# Altium PCB DRVS-PCB.PcbDoc (part 3 of 3)
Units mm, origin at the board's own origin, x right, y up, seen from the top; angles counter-clockwise.
Board outline 50.67 x 58.05 mm, 4 copper layers (Top Layer, Layer 1, Layer 2, Bottom Layer), stack 1.553 mm thick; 72 components, 76 nets, 302 pads, 127 vias.
Unrouted connection lines stored in the file: 20.
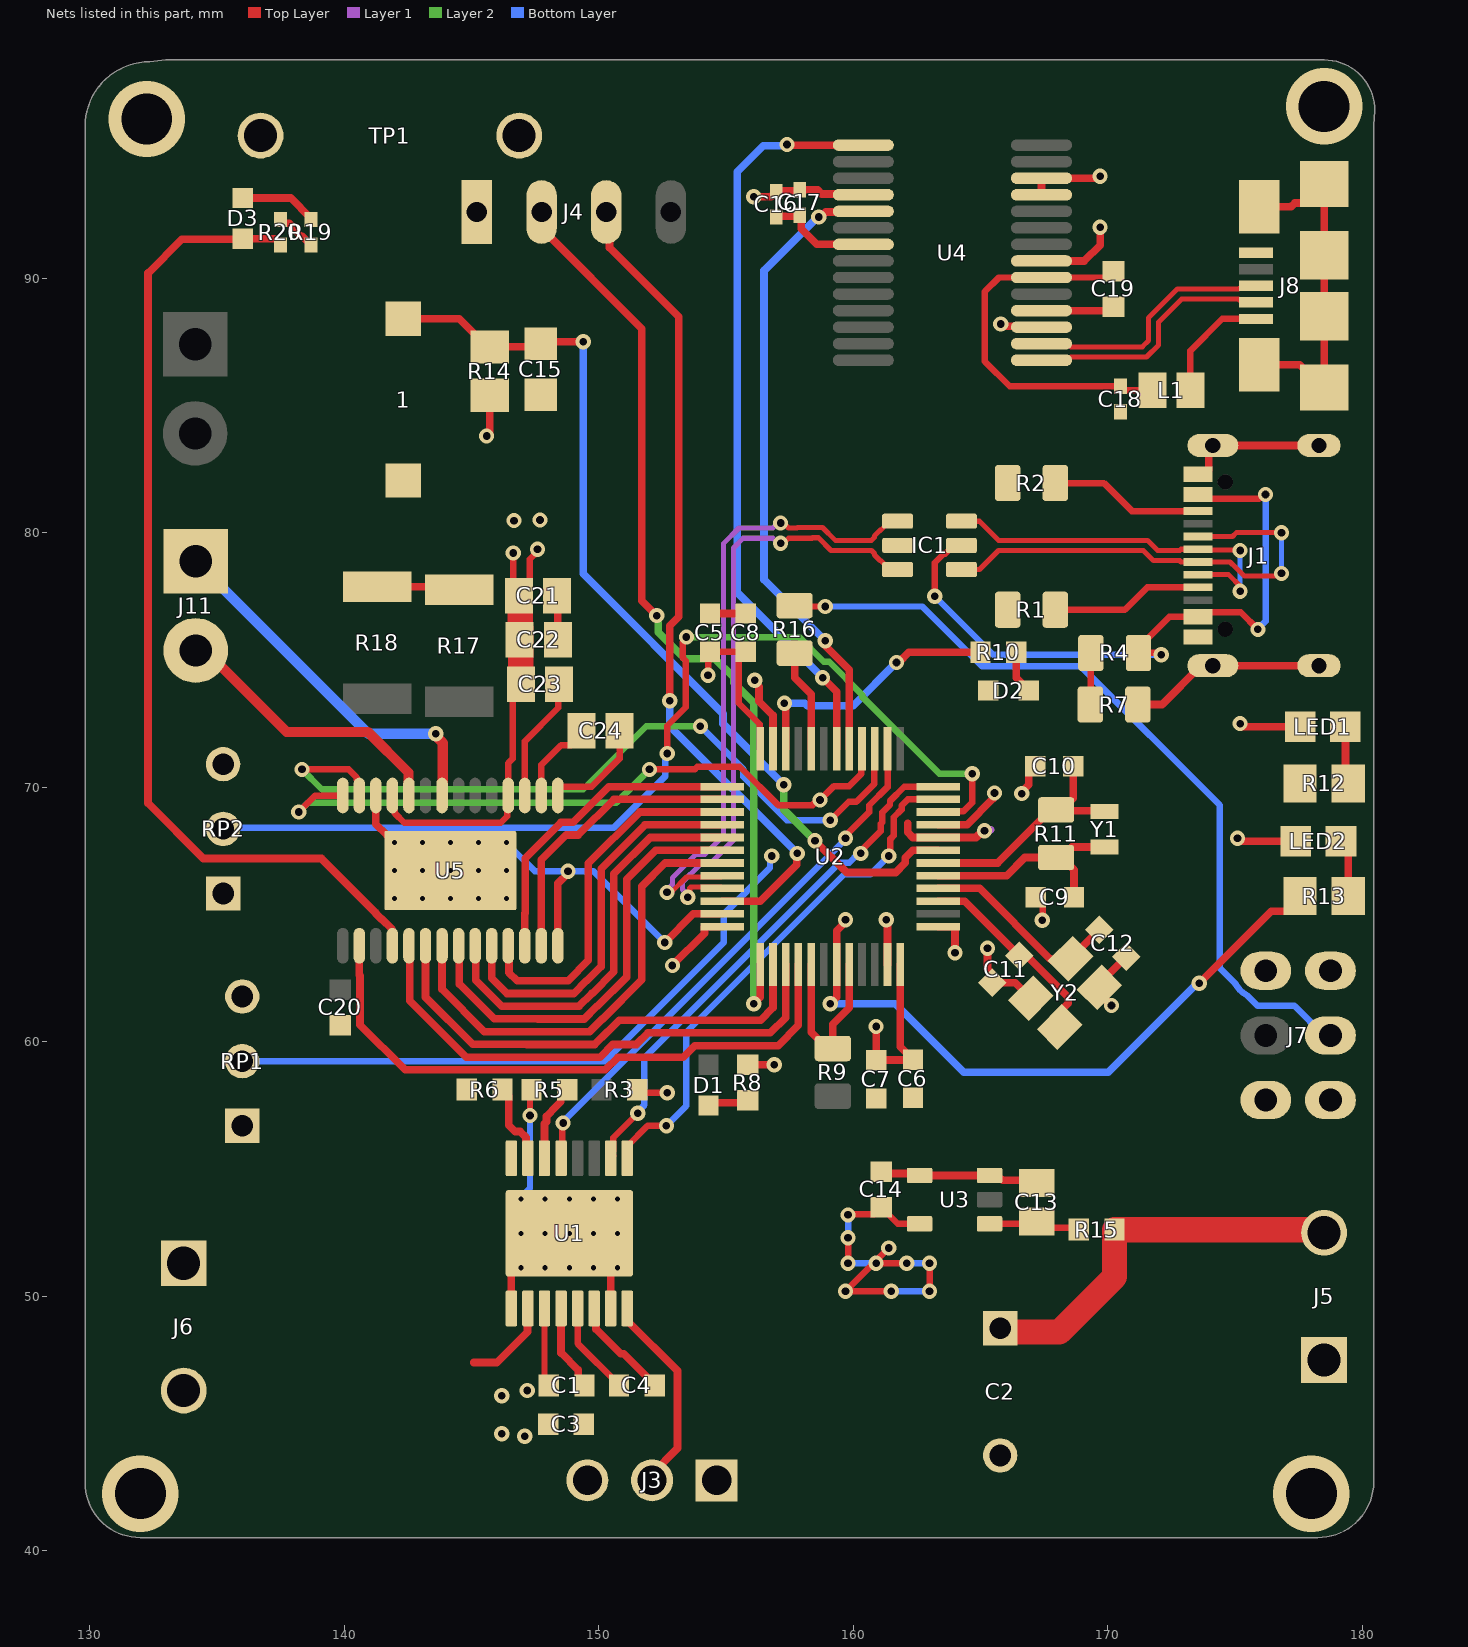
[diagram p4: the nets of this part, all layers, seen from the top]

## Via types
v1: diameter 0.6, hole 0.3, Top Layer to Bottom Layer, 93 vias
v2: diameter 0.5, hole 0.2, Top Layer to Bottom Layer, 18 vias
v3: diameter 0.5, hole 0.2, Top Layer to Bottom Layer, tented both sides, 12 vias
v4: diameter 3, hole 2, Top Layer to Bottom Layer, 4 vias

## Nets (pads, with @x,y where several pads share a name; then routed paths per layer and width w, separated by ;. In a path a pad name is that pad's centre, name@x,y a point inside that pad or via, vN(x,y) a via of type N, cw(c..) or ccw(c..) an arc to the next point about the centre after c; other vN are vias at no path point) (continued)
BOOT1: J7.4 R16.1 | length 31.8
  Top Layer w0.254: R16.1@157.7,77.135 157.735,77.1 v1(158.9,77.1)
  Bottom Layer w0.254: v1(158.9,77.1) 162.713,77.1 165.067,74.746 168.954,74.746 174.4,69.3 174.4,62.9 175.002,62.298 ccw(c175.96,62.79) 175.468,61.832 175.884,61.416 177.334,61.416 178.5,60.25 J7.4@178.75,60.25
BOUT1: J11.2 U5.10 | length 11.3
  Top Layer w0.4: J11.2@134.175,75.375 134.538,75.375 137.738,72.175 140.938,72.175 142.531,70.582 142.531,69.694 U5.10@142.55,69.675
BOUT2: J11.1 U5.8 | length 14.8
  Top Layer w0.4: v1(143.6,72.1) 143.638,72.062 143.638,71.981 143.875,71.744 143.875,70.21 143.86,70.195 143.86,69.685 U5.8@143.85,69.675
  Bottom Layer w0.4: J11.1@134.175,78.88 140.955,72.1 v1(143.6,72.1)
CPH: C4.1 U1.13 | length 3.8
  Top Layer w0.254: U1.13@149.174,49.525 149.174,48.151 150.8,46.525 C4.1@150.8,46.5 C4.1@150.874,46.574
CPL: C4.2 U1.14 | length 4.1
  Top Layer w0.3: U1.14@149.824,49.525 149.899,49.45 149.899,48.709 150.866,47.742 150.983,47.742 152.2,46.525 C4.2@152.2,46.5
D_N: IC1.1 U2.32 | length 24.9
  Top Layer w0.2: v1@152.892,65.913 153.454,66.475 154.812,66.475 U2.32@154.862,66.525 ; v1(157.15,80.383) 157.258,80.383 157.458,80.183 157.799,80.183 157.816,80.2 158.8,80.2 159.3,79.7 160.723,79.7 160.84,79.817 160.84,79.876 161.059,80.095 161.08,80.095 161.435,80.45 IC1.1@161.745,80.45
  Layer 1 w0.2: v1(152.688,65.868) 152.688,65.974 152.899,66.186 152.899,66.441 153.816,67.358 154.169,67.358 154.9,68.089 154.9,79.566 155.517,80.183 156.842,80.183 157.042,80.383 v1(157.15,80.383)
D_P: IC1.3 U2.33 | length 24.2
  Top Layer w0.2: v1@153.355,65.528 v1(153.503,65.675) v1@153.4,65.675 ; v1@153.394,65.675 v1@153.4,65.675 ; U2.33@154.862,66.025 154.812,66.075 154.012,66.075 153.62,66.075 153.579,66.034 153.579,65.854 v1@153.4,65.675 ; v1(157.15,79.583) 157.258,79.583 157.458,79.783 158.383,79.783 158.4,79.8 158.634,79.8 159.134,79.3 160.723,79.3 160.84,79.183 160.84,79.124 161.059,78.905 161.08,78.905 161.435,78.55 IC1.3@161.745,78.55
  Layer 1 w0.2: v1(153.503,65.675) 153.503,65.783 153.299,65.987 153.299,66.275 153.982,66.958 154.335,66.958 155.3,67.923 155.3,79.4 155.683,79.783 156.842,79.783 157.042,79.583 v1(157.15,79.583)
EN_IN1: U1.1 U2.11 | length 20.9
  Top Layer w0.254: U1.1@151.124,55.425 151.124,55.9 151.924,56.7 v1(152.665,56.7) ; v1(161.4,67.3) 161.466,67.366 161.466,67.968 161.6,68.102 161.6,68.822 161.901,69.124 161.901,69.274 162.152,69.525 U2.11@163.338,69.525
  Bottom Layer w0.254: v1(152.665,56.7) 153.446,57.481 153.446,60.375 159.652,66.581 160.681,66.581 v1(161.4,67.3)
GND: 1.1 C2.2 C3.2 C5.1 C6.1 C7.1 C8.1 C9.1 C10.1 C11.1 C12.1 C13.2 C14.2 C15.1 C16.2 C17.2 C18.2 C19.2 C20.2 C21.1 C22.1 D2.1 IC1.2 J1.A1_B12 J1.B1_A12 J1.S1 J1.S2 J1.S3 J1.S4 J3.1 J4.1 J5.1 J7.5 J7.6 J8.5 J8.6 J8.7 J8.8 J8.9 J8.10 J8.11 R1.2 R2.1 R5.1 R6.1 R7.2 R12.1 R17.1 R18.1 RP1.1 RP2.1 TP1.1 TP1.2 U1.9 U1.15 U1.17@148.849,52.475 U2.8 U2.23 U2.35 U2.47 U3.3 U3.4 U4.7 U4.18 U4.21 U4.25 U4.26 U5.12 U5.28 U5.29 Y2.2 Y2.4 | length 93.9
  Top Layer w0.254: v1(147.305,57.103) 147.305,58.063 R5.1@147.361,58.12 ; C9.1@167.175,65.675 167.448,65.402 167.448,64.798 v1(167.425,64.775)
  Top Layer w0.3: U5.12@141.25,69.675 141.25,68.55 141.675,68.125 141.735,68.125 141.975,67.885 v2(141.975,67.825) ; R18.1@141.3,77.875 144.4,77.875 R17.1@144.525,77.75 ; U1.9@146.574,49.525 146.574,50.925 146.774,51.125 v3(146.949,51.125) ; C21.1@148.375,77.525 148.4,77.5 C22.1@148.4,75.8 ; U5.28@148.4,63.775 148.4,66.219 148.8,66.619 v1(148.8,66.7) ; U1.15@150.474,49.525 150.474,50.925 150.674,51.125 v3(150.749,51.125) ; v1(152.6,63.9) 153.725,65.025 U2.35@154.862,65.025 ; C5.1@154.375,76.825 C8.1@155.775,76.825 ; v1(156.132,74.2) 156.132,74.119 156.3,73.951 156.3,73.381 156.85,72.831 U2.23@156.85,71.513 ; C16.2@156.975,92.4 157.013,92.437 C17.2@157.863,92.437 ; C17.2@157.9,92.475 157.956,92.419 157.956,91.944 158.575,91.325 U4.7@160.4,91.325 ; C14.2@161.1,54.9 161.175,54.825 162.534,54.825 U3.4@162.609,54.75 U3.3@165.359,54.75 165.509,54.6 165.838,54.6 165.884,54.555 166.859,54.555 C13.2@167.213,54.2 ; v1(161.3,64.8) 161.35,64.75 U2.47@161.35,63.037 ; 162.138,68.575 162.138,68.23 162.343,68.025 U2.8@163.338,68.025 164.825,68.025 165.09,68.29 v1(165.16,68.29) ; v1(165.275,63.675) 165.275,62.868 165.47,62.673 C11.1@165.47,62.32 166.375,62.32 Y2.4@166.981,61.713 ; v1(166.625,69.75) 166.625,69.831 166.9,70.106 166.9,70.569 C10.1@167.15,70.819 ; U4.18@167.4,88.725 170.075,88.725 C19.2@170.225,88.875 ; U4.21@167.4,90.675 169.075,90.675 169.7,91.3 v1(169.7,92) ; U4.25@167.4,93.275 U4.26@167.4,93.925 169.625,93.925 v1(169.7,94) ; v1(170.15,61.425) 169.668,61.907 Y2.2@169.668,62.137 169.668,62.283 C12.1@170.73,63.345 ; R7.2@171.185,73.25 172.135,73.25 173.66,74.775 J1.S1@174.13,74.775 J1.S3@178.3,74.775 ; J1.B1_A12@173.55,82.3 173.82,82.3 173.97,82.45 173.97,83.265 J1.S2@174.13,83.425 J1.S4@178.3,83.425 ; J8.10@175.95,86.6 177.55,86.6 178.45,85.7 178.5,85.75 J8.6@178.5,88.5 J8.7@178.5,90.9 J8.9@178.5,93.7 177.75,92.95 177.35,92.95 177.2,92.8 J8.11@175.95,92.8
  Layer 1 w0.3: v1(165.16,68.29) 165.194,68.325 v1@165.4,68.325
  Bottom Layer w0.254: v2(146.375,67.825) 147.5,66.7 v1(148.8,66.7) 149.8,66.7 v1(152.6,63.9) ; v3(146.949,53.825) 146.949,53.892 147.305,54.247 v1(147.305,57.103)
  other v2: 147.899,52.475 148.849,52.475 149.799,52.475 141.975,65.625 143.075,65.625 144.175,65.625 145.275,65.625 146.375,65.625 141.975,66.725 143.075,66.725 144.175,66.725 145.275,66.725 146.375,66.725 143.075,67.825 144.175,67.825 145.275,67.825
  other v3: 147.899,51.125 148.849,51.125 149.799,51.125 146.949,52.475 150.749,52.475 147.899,53.825 148.849,53.825 149.799,53.825 150.749,53.825
  other v4: 132,42.25 178,42.25 132.25,96.25 178.5,96.75
GPIO_V3P3: R19.2 R20.2 | length 1.7
  Top Layer w0.3: R20.2@137.5,92.3 137.5,92.25 137.6,92.15 137.85,92.15 138.1,91.9 138.1,91.855 138.305,91.65 138.35,91.65 138.55,91.45 138.6,91.45 138.7,91.35 R19.2@138.7,91.3
IMODE: R6.2 U1.7 | length 3.2
  Top Layer w0.3: R6.2@146.224,58.125 146.474,57.875 146.474,56.726 146.725,56.475 146.915,56.475 147.149,56.241 147.149,55.5 U1.7@147.224,55.425
NetC1_2: C1.2 U1.12 | length 3.4
  Top Layer w0.3: U1.12@148.524,49.525 148.524,47.776 149.196,47.104 149.196,46.75 C1.2@149.446,46.5
NetC13_1: C13.1 R15.2 U3.1 | length 3.6
  Top Layer w0.254: U3.1@165.359,52.85 167.063,52.85 167.213,52.7 168.792,52.7 R15.2@168.867,52.625
NetC24_1: C24.1 U5.1 | length 4.3
  Top Layer w0.254: U5.1@148.4,69.675 148.4,69.932 148.491,70.023 149.723,70.023 150.825,71.125 C24.1@150.825,72.225
NetC24_2: C24.2 U5.2 | length 3.4
  Top Layer w0.254: U5.2@147.75,69.675 147.75,70.875 148.527,71.652 148.902,71.652 149.325,72.075 C24.2@149.325,72.225
NetD1_2: D1.2 R8.2 | length 1.6
  Top Layer w0.3: D1.2@154.318,57.5 154.418,57.6 155.764,57.6 R8.2@155.864,57.7
NetD2_2: D2.2 R10.2 | length 1.7
  Top Layer w0.3: R10.2@166.4,75.3 166.4,74.3 D2.2@166.9,73.8
NetD3_2: D3.2 R19.1 | length 3.1
  Top Layer w0.3: D3.2@136.025,93.15 137.9,93.15 138.7,92.35 R19.1@138.7,92.3
NetJ1_A5: J1.A5 R1.1 | length 6
  Top Layer w0.254: R1.1@167.941,76.975 170.675,76.975 171.55,77.85 J1.A5@173.55,77.85
NetJ1_B5: J1.B5 R2.2 | length 6.1
  Top Layer w0.254: R2.2@167.941,81.95 169.85,81.95 170.95,80.85 J1.B5@173.55,80.85
NetLED1_K: LED1.K R12.2 | length 2.3
  Top Layer w0.3: LED1.K@179.339,72.375 179.339,70.261 R12.2@179.45,70.15
NetLED2_K: LED2.K R13.2 | length 2.3
  Top Layer w0.3: LED2.K@179.164,67.875 179.45,67.589 R13.2@179.45,65.725
NetR16_2: R16.2 U2.20 | length 4
  Top Layer w0.3: R16.2@157.7,75.265 157.7,74.3 158.35,73.65 U2.20@158.35,71.513
nFAULT: D3.1 R20.1 U5.18 | length 39
  Top Layer w0.3: R20.1@137.5,91.3 137.5,91.35 137.3,91.55 D3.1@136.025,91.55 136.005,91.53 133.63,91.53 132.3,90.2 132.3,69.375 134.475,67.2 139.113,67.2 141.235,65.078 141.235,65.057 141.467,64.825 141.488,64.825 141.871,64.442 141.871,63.804 U5.18@141.9,63.775
NRST: 1.2 C15.2 R14.1 U2.7 | length 36.8
  Top Layer w0.3: 1.2@142.325,88.4 144.525,88.4 145.625,87.3 R14.1@145.725,87.3 147.6,87.3 C15.2@147.725,87.425 147.8,87.5 v1(149.4,87.5) ; v1(158.5,67.9) 159.75,66.65 161.669,66.65 162.05,67.031 162.05,67.232 162.343,67.525 U2.7@163.338,67.525
  Layer 2 w0.3: v1@157.275,70.089 157.275,69.125 v1(158.5,67.9)
  Bottom Layer w0.3: v1(149.4,87.5) 149.4,78.381 154.887,72.894 154.887,72.488 v1(157.275,70.1)
OUT1: J6.1 U1.8
OUT2: J6.2 U1.10 | length 3.5
  Top Layer w0.3: 145.1,47.4 146,47.4 147.208,48.608 147.208,49.509 U1.10@147.224,49.525
PB5: R9.1 U2.41 U2.44 | length 7.3
  Top Layer w0.3: U2.41@158.35,63.037 158.35,60.375 158.99,59.735 R9.1@159.2,59.735 159.2,60.681 159.85,61.331 U2.44@159.85,63.037
PB12: R13.1 U2.43 | length 26
  Top Layer w0.3: v1(159.1,61.5) 159.35,61.75 159.35,64.369 159.7,64.719 v1(159.7,64.8) ; v1(173.6,62.3) 176.425,65.125 177.05,65.125 177.55,65.625 R13.1@177.55,65.725
  Bottom Layer w0.3: v1(159.1,61.5) 161.65,61.5 164.35,58.8 170.025,58.8 173.525,62.3 v1(173.6,62.3)
PH_IN2: U1.2 U2.12 | length 21.1
  Top Layer w0.254: U1.2@150.474,55.425 150.572,55.523 150.474,55.621 150.572,55.719 150.572,56.231 150.793,56.452 150.796,56.452 v1(151.539,57.195) ; v1(160.3,67.4) 160.3,67.494 161.086,68.279 161.086,68.557 161.146,68.617 161.146,69.011 161.447,69.312 161.447,69.462 162.01,70.025 U2.12@163.338,70.025
  Bottom Layer w0.254: v1(151.539,57.195) 151.539,57.256 151.8,57.517 151.8,59.371 159.464,67.035 159.841,67.035 160.206,67.4 v1(160.3,67.4)
PIN13: U2.15 U5.13 | length 30.5
  Top Layer w0.254: v1(138.35,70.7) v1(138.35,70.7) 140.179,70.702 140.502,70.379 140.502,70.301 140.6,70.203 U5.13@140.6,69.675 ; v1(159.1,68.7) 159.827,69.427 160.127,69.427 160.827,70.127 160.827,71.49 U2.15@160.85,71.513
  Layer 2 w0.254: v1(138.35,70.7) 139.125,69.925 149.4,69.925 151.875,72.4 v1(154,72.4)
  Bottom Layer w0.254: v1(154,72.4) 155.683,70.717 155.683,70.417 157.4,68.7 v1(159.1,68.7)
PIN14: U2.16 U5.14 | length 27
  Top Layer w0.254: v1(138.225,69.029) 138.871,69.675 U5.14@139.95,69.675 ; v1(152,70.7) 153.772,70.7 153.872,70.8 155.549,70.8 157.049,69.3 158.406,69.3 158.606,69.5 v1(158.7,69.5) 159.247,70.047 159.846,70.047 160.327,70.528 160.327,71.49 U2.16@160.35,71.513
  Layer 2 w0.254: v1(138.225,69.029) 138.596,69.4 150.7,69.4 v1(152,70.7)
PIN19: U2.39 U5.19 | length 20.6
  Top Layer w0.3: U5.19@142.55,63.775 142.579,63.746 142.579,61.621 144.8,59.4 146.976,59.4 146.981,59.395 150.057,59.395 150.557,59.895 151.488,59.895 151.943,60.35 156.75,60.35 157.35,60.95 U2.39@157.35,63.037
PIN20: U2.38 U5.20 | length 18.7
  Top Layer w0.3: U5.20@143.2,63.775 143.2,61.75 145.05,59.9 147.183,59.9 147.188,59.895 149.849,59.895 150.349,60.395 150.364,60.395 150.819,60.85 155.831,60.85 156.369,60.85 156.85,61.331 U2.38@156.85,63.037
PIN21: U2.31 U5.21 | length 18.3
  Top Layer w0.3: U5.21@143.85,63.775 143.85,62.066 145.516,60.4 147.391,60.4 147.396,60.395 149.642,60.395 150.142,60.895 150.157,60.895 151.7,62.438 151.7,65.185 151.7,66.1 152.625,67.025 U2.31@154.862,67.025
PIN22: U2.30 U5.22 | length 17.4
  Top Layer w0.3: U5.22@144.5,63.775 144.529,63.746 144.529,62.273 145.902,60.9 147.598,60.9 147.603,60.895 149.435,60.895 149.935,61.395 149.95,61.395 151.1,62.545 151.1,66.386 152.239,67.525 U2.30@154.862,67.525
PIN23: U2.29 U5.23 | length 16.5
  Top Layer w0.3: U5.23@145.15,63.775 145.179,63.746 145.179,62.414 146.193,61.4 147.805,61.4 147.81,61.395 149.228,61.395 149.728,61.895 149.743,61.895 150.6,62.752 150.6,66.593 152.032,68.025 U2.29@154.862,68.025
PIN24: U2.28 U5.24 | length 15.6
  Top Layer w0.3: U5.24@145.8,63.775 145.8,62.5 146.4,61.9 148.012,61.9 148.017,61.895 149.021,61.895 149.521,62.395 149.536,62.395 150.1,62.959 150.1,66.8 151.825,68.525 U2.28@154.862,68.525
PIN25: U2.27 U5.25 | length 14.6
  Top Layer w0.3: U5.25@146.45,63.775 146.479,63.746 146.479,62.721 146.8,62.4 148.8,62.4 149.6,63.2 149.6,67.007 151.618,69.025 U2.27@154.862,69.025
PMODE: J3.2 U1.16 | length 8.5
  Top Layer w0.3: U1.16@151.124,50 U1.16@151.124,49.525 151.124,49.05 153.1,47.074 153.1,44.03 152.1,43.03 J3.2@152.1,42.776
RX: U2.17 U4.5 | length 25
  Top Layer w0.3: v1(158.65,92.4) 158.731,92.4 158.927,92.596 160.371,92.596 U4.5@160.4,92.625 ; v1(158.899,75.757) 158.899,75.561 159.85,74.61 U2.17@159.85,71.513
  Bottom Layer w0.3: v1(158.65,92.4) 158.6,92.4 156.5,90.3 156.5,78.156 v1(158.899,75.757)
SPD_REF_1: RP1.2 | length 25
  Bottom Layer w0.254: RP1.2@136,59.24 150.248,59.24 154.923,63.915 154.923,65.023 156.734,66.834 156.734,67.234 v1(156.8,67.3)
SPD_REF_2: RP2.2 U2.10 | length 40.3
  Top Layer w0.254: v1(152.7,71.327) 152.7,72.413 153.427,73.14 153.427,74.973 153.3,75.1 153.3,75.7 153.45,75.85 v1(153.45,75.9) ; U2.10@163.338,69.025 163.361,69.048 164.323,69.048 164.675,69.4 v1(164.675,70.525)
  Layer 2 w0.254: v1(153.45,75.9) 157.869,75.9 158.842,74.927 159.06,74.927 160.35,73.637 160.35,73.563 163.388,70.525 v1(164.675,70.525)
  Bottom Layer w0.254: RP2.2@135.25,68.365 135.287,68.402 150.589,68.402 152.627,70.44 152.627,71.227 152.7,71.3 v1(152.7,71.327)
STATUS: R10.1 U2.22 | length 10.4
  Top Layer w0.3: v1(157.3,73.3) 157.35,73.25 U2.22@157.35,71.513 ; v1(161.7,74.9) 161.781,74.9 162.181,75.3 R10.1@165,75.3
  Bottom Layer w0.3: v1(157.3,73.3) 158.1,73.3 158.2,73.2 160,73.2 v1(161.7,74.9)
STM32H7_VBUS: R4.2 R7.1 | length 2
  Top Layer w0.254: R7.1@169.315,73.25 169.327,73.262 169.327,75.262 R4.2@169.34,75.275
SWCLK: J4.2 U2.37 | length 36.9
  Top Layer w0.3: J4.2@147.76,92.6 147.76,91.95 151.7,88.01 151.7,77.325 v1(152.282,76.743) ; v1(156.1,61.5) 156.35,61.75 U2.37@156.35,63.037
  Layer 2 w0.3: v1(152.282,76.743) 152.34,76.685 152.34,76.091 153.381,75.05 154.569,75.05 155.306,74.313 155.306,74.107 156.1,73.313 v1(156.1,61.5)
SWDIO: J4.3 U2.34 | length 32.6
  Top Layer w0.3: J4.3@150.3,92.6 150.43,92.47 150.43,91.195 153.15,88.475 153.15,76.7 152.8,76.35 v1(152.8,73.4) ; U2.34@154.862,65.525 156.344,65.525 157.779,66.96 157.779,67.379 v1(157.8,67.4)
  Bottom Layer w0.3: v1(152.8,73.4) 152.8,72.4 v1(157.8,67.4)
TOFF: U2.40 U5.16 | length 24.2
  Top Layer w0.3: U5.16@140.6,63.775 140.6,62.62 140.625,62.595 140.625,60.675 142.4,58.9 146.769,58.9 146.774,58.895 150.264,58.895 150.764,59.395 153.318,59.395 153.773,59.85 157.05,59.85 157.85,60.65 U2.40@157.85,63.037
TRQ0: U2.26 U5.27 | length 11.5
  Top Layer w0.3: U5.27@147.75,63.775 147.75,67.143 148.732,68.125 149.207,68.125 150.607,69.525 U2.26@154.862,69.525
TRQ1: U2.25 U5.26 | length 12.4
  Top Layer w0.3: U5.26@147.1,63.775 147.1,65.042 147.115,65.057 147.115,67.215 148.525,68.625 149,68.625 150.4,70.025 U2.25@154.862,70.025
TX: U2.18 U4.1 | length 29.7
  Top Layer w0.3: v1(157.4,95.25) 157.425,95.225 U4.1@160.4,95.225 ; v1(158.8,74.3) 159.35,73.75 U2.18@159.35,71.513
  Bottom Layer w0.3: v1(157.4,95.25) 157.345,95.195 156.47,95.195 155.45,94.175 155.45,77.65 v1(158.8,74.3)
USB_Con_C1_N: IC1.6 J1.A7 J1.B7 | length 15.1
  Top Layer w0.2: IC1.6@164.255,80.45 164.96,80.45 165.71,79.7 171.566,79.7 171.966,79.3 172.83,79.3 172.88,79.35 J1.A7@173.55,79.35 173.575,79.325 175.175,79.325 v1(175.2,79.3) ; J1.B7@173.55,78.35 174.75,78.35 175.217,77.883 175.217,77.717 v1(175.2,77.7)
  Bottom Layer w0.2: v1(175.2,77.7) v1(175.2,79.3)
USB_Con_C1_P: IC1.4 J1.A6 J1.B6 | length 18.3
  Top Layer w0.2: IC1.4@164.255,78.55 164.96,78.55 165.71,79.3 171.4,79.3 171.8,78.9 172.83,78.9 172.88,78.85 J1.A6@173.55,78.85 174.801,78.85 174.901,78.75 174.916,78.75 175.366,78.3 176.619,78.3 176.719,78.4 v1(176.827,78.4) ; J1.B6@173.55,79.85 174.901,79.85 175.051,80 v1(176.827,80)
  Bottom Layer w0.2: v1(176.827,78.4) v1(176.827,80)
USB_Conn_C1_VBUS: IC1.5 J1.A4_B9 J1.B4_A9 R4.1 | length 27.4
  Top Layer w0.254: v1(163.2,77.5) 163.2,78.814 163.558,79.172 163.617,79.172 163.945,79.5 IC1.5@164.255,79.5 ; v1(172.1,75.2) 172.025,75.275 R4.1@171.21,75.275 171.21,75.485 172.425,76.7 J1.A4_B9@173.55,76.7 173.723,76.873 175.227,76.873 v1(175.9,76.2) ; J1.B4_A9@173.55,81.5 173.723,81.327 175.933,81.327 176.106,81.5 v1(176.2,81.5)
  Bottom Layer w0.254: v1(163.2,77.5) 165.5,75.2 v1(172.1,75.2) ; v1(175.9,76.2) 175.9,76.222 176.2,76.522 v1(176.2,81.5)
USB_N: J8.2 U4.15 | length 10
  Top Layer w0.2: U4.15@167.4,86.775 168.443,86.775 168.568,86.9 171.524,86.9 172,87.376 172,88.275 172.9,89.175 174.397,89.175 175.133,89.175 175.158,89.15 175.725,89.15 J8.2@175.825,89.05
USB_P: J8.3 U4.16 | length 10
  Top Layer w0.2: U4.16@167.4,87.425 168.443,87.425 168.568,87.3 171.358,87.3 171.6,87.542 171.6,88.441 172.734,89.575 174.563,89.575 175.133,89.575 175.158,89.6 175.725,89.6 J8.3@175.825,89.7
V_IPROPI: R5.2 U1.6 | length 3.1
  Top Layer w0.3: U1.6@147.874,55.425 147.874,56.774 147.954,56.854 147.954,57.081 148.335,57.462 ; 148.336,57.462 148.511,57.638 148.511,57.87 R5.2@148.761,58.12
VBUS: J8.1 L1.2 | length 4.6
  Top Layer w0.254: L1.2@173.25,85.6 173.25,87.15 174.5,88.4 J8.1@175.825,88.4
VCC: C5.2 C6.2 C7.2 C8.2 C14.1 C16.1 C17.1 J3.3 J7.1 J7.2 LED1.A LED2.A R3.1 R8.1 R14.2 RP1.3 RP2.3 U2.1 U2.9 U2.24 U2.36 U2.48 U3.5 U4.4 U4.17 | length 50.7
  Top Layer w0.254: R3.1@151.516,58.12 151.636,58 v1(152.7,58) ; v1(154.3,74.4) 154.3,75.25 C5.2@154.375,75.325 C8.2@155.775,75.325 155.505,75.055 155.505,73.295 156.327,72.473 156.327,71.536 U2.24@156.35,71.513 ; v1(159.8,51.3) v1(159.8,52.3) ; v1(159.8,53.2) 159.827,53.227 160.827,53.227 C14.1@161.1,53.5 161.125,53.5 161.398,53.227 161.398,53.202 161.75,52.85 U3.5@162.609,52.85 ; v1(160.9,51.3) v1(162.1,51.3) ; v1(161.4,51.9) v1(159.7,50.2) v1(161.5,50.2) ; v1(163,50.2) v1(163,51.3)
  Top Layer w0.3: v1(145.6,83.8) 145.725,83.925 R14.2@145.725,85.4 ; v1(152.9,63) 154.162,64.262 154.162,64.525 U2.36@154.862,64.525 ; R8.1@155.864,59.1 v1(156.9,59.1) ; v1(156.1,93.2) 156.775,93.2 156.825,93.25 156.875,93.25 156.975,93.35 C16.1@156.975,93.4 157.013,93.437 157.863,93.437 C17.1@157.9,93.475 158.6,93.475 158.771,93.304 160.371,93.304 U4.4@160.4,93.275 ; v1(160.9,60.6) C7.2@160.9,59.275 160.913,59.288 162.338,59.288 C6.2@162.35,59.3 161.85,59.8 U2.48@161.85,63.037 ; U2.1@163.338,64.525 164,64.525 v1(164,63.5) ; U2.9@163.338,68.525 164.475,68.525 165.493,69.543 165.493,69.718 v1(165.55,69.775) ; v1(165.8,88.2) 165.896,88.104 167.371,88.104 U4.17@167.4,88.075 ; v1(175.1,68) 175.101,67.999 175.225,67.875 LED2.A@177.386,67.875 ; v1(175.2,72.5) 175.325,72.375 LED1.A@177.561,72.375
  Bottom Layer w0.254: v1(159.8,51.3) v1(160.9,51.3) ; v1(159.8,52.3) v1(159.8,53.2) ; v1(161.5,50.2) v1(163,50.2) ; v1(162.1,51.3) v1(163,51.3)
  Bottom Layer w0.3: v1(145.6,83.8) v1@145.6,83.9
VCP: C23.1 U5.3 | length 4.9
  Top Layer w0.254: U5.3@147.1,69.675 147.1,71.8 148.418,73.118 148.418,74.018 C23.1@148.45,74.05
VM: C1.1 C2.1 C3.1 C21.2 C22.2 C23.2 J5.2 R15.1 U1.11 U5.4 U5.11 | length 37
  Top Layer w0.254: U5.11@141.863,69.713 U5.11@141.9,69.675 141.9,69.147 141.998,69.049 141.998,68.971 142.367,68.602 146.151,68.602 146.412,68.863 146.412,69.638 U5.4@146.45,69.675 146.45,70.95 146.627,71.127 146.627,73.727 C23.2@146.9,74 ; v1(146.65,79.2) 146.65,77.75 C21.2@146.875,77.525 147.298,77.948 147.298,78.954 147.6,79.256 v1(147.6,79.35) ; U1.11@147.874,49.525 147.874,46.671 C1.1@148.046,46.5
  Top Layer w1: C21.2@146.875,77.525 146.925,77.475 146.925,76.275 146.95,76.25 C23.2@146.95,74.05 C23.2@146.9,74 ; C2.1@165.775,48.75 165.925,48.6 168.1,48.6 170.267,50.767 R15.1@170.267,52.625 178.375,52.625 J5.2@178.5,52.5
  other v1: 147.1,44.5 146.2,44.6 146.2,46.1 147.2,46.3 146.675,80.475 147.7,80.5
VREF: U1.5 U2.14 | length 21.4
  Top Layer w0.254: U1.5@148.524,55.425 148.564,55.465 148.564,56.772 v1(148.604,56.812) ; v1(159.7,68) 159.7,68.094 160.63,69.023 160.63,69.288 161.35,70.008 U2.14@161.35,71.513
  Bottom Layer w0.254: v1(148.604,56.812) 148.604,56.858 159.7,67.954 v1(159.7,68)
VUSB: C18.1 C19.1 L1.1 U4.20 | length 15.2
  Top Layer w0.254: C19.1@170.225,90.275 169.975,90.025 U4.20@167.4,90.025 165.725,90.025 165.173,89.473 165.173,86.727 166.15,85.75 C18.1@170.5,85.75 170.5,85.723 170.623,85.6 L1.1@171.75,85.6
XTALA: C9.2 R11.1 U2.5 Y1.1 | length 8.8
  Top Layer w0.3: U2.5@163.338,66.525 166.025,66.525 166.74,67.24 R11.1@167.975,67.24 R11.1@168.185,67.24 ; C9.2@168.675,65.675 168.675,66.75 R11.1@168.185,67.24 ; Y1.1@169.875,67.65 168.595,67.65 R11.1@168.185,67.24
XTALB: C10.2 R11.2 U2.6 Y1.2 | length 9.3
  Top Layer w0.3: U2.6@163.338,67.025 165.68,67.025 167.765,69.11 R11.2@167.975,69.11 R11.2@168.185,69.11 ; C10.2@168.65,70.819 168.65,69.575 R11.2@168.185,69.11 ; Y1.2@169.875,69.05 169.845,69.08 168.215,69.08 R11.2@168.185,69.11
XTALC: C11.2 U2.3 Y2.1 | length 8
  Top Layer w0.3: U2.3@163.338,65.525 164.386,65.525 C11.2@166.53,63.38 166.82,63.38 168.443,61.757 168.443,61.509 168.113,61.179 Y2.1@168.113,60.582
XTALD: C12.2 U2.4 Y2.3 | length 8
  Top Layer w0.3: U2.4@163.338,66.025 164.975,66.025 167.731,63.269 167.759,63.269 167.848,63.18 168.449,63.18 168.449,63.184 C12.2@169.67,64.405
pads on no net: J1. J1.A8 J1.B8 J8.4 SH-J1.0 U1.17@148.849,52.475 U2.2 U2.19 U2.21 U2.42 U2.45 U2.46 U3.2 U4.2 U4.3 U4.6 U4.8 U4.9 U4.10 U4.11 U4.12 U4.13 U4.14 U4.19 U4.22 U4.23 U4.24 U4.27 U4.28 U5.17

## Polygon pours and split planes (outlines as drawn)
GND on Bottom Layer "GND_L04_P020" (solid, pour order 20): 129.825,42.675 ccw(c131.987,42.687) 132,40.525 178.25,40.525 ccw(c178.263,42.712) 180.45,42.7 180.45,96 180.5,96.575 ccw(c178.5,96.575) 178.5,98.575 133,98.575 132.365,98.5 ccw(c132.365,95.96) 129.825,95.96
VM on Bottom Layer "TOP_LAYER_NONET_P-001" (solid, pour order 1): 166.8,49.55 166.8,45.5 149.3,45.5 147.8,44 145.8,44 145.8,46.758 164,47.1 164,49.658
GND on Top Layer "GND_L01_P016" (solid, pour order 16): 129.825,42.675 ccw(c131.987,42.687) 132,40.525 178.25,40.525 ccw(c178.263,42.712) 180.45,42.7 180.45,96 180.5,96.575 ccw(c178.5,96.575) 178.5,98.575 133,98.575 132.365,98.5 ccw(c132.365,95.96) 129.825,95.96
OUT1 on Top Layer "TOP_LAYER_NONET_P-001" (solid, pour order 5): 145.2,56.6 145.3,56.5 146.8,56.5 146.8,56.3 146.9,56.2 146.9,54.6 146.6,54.6 141.8,49.8 132.4,49.8 132.4,52.6 132.4,53.3 142.5,53.3 145.7,56.5
OUT2 on Top Layer "TOP_LAYER_NONET_P-001" (solid, pour order 4): 146.9,48.5 146.9,47.8 146.2,47.1 140,47.1 137.9,45 131.9,45 131.9,48.3 132.3,48.7 132.5,48.5 144.4,48.5
VM on Top Layer "TOP_LAYER_NONET_P-001" (solid, pour order 2): 145.8,46.9 148.9,46.9 148.8,46.8 148.8,44 145.8,44
VCC on Top Layer "TOP_LAYER_NONET_P-001" (solid, pour order 0): 159.3,54.2 159.5,54 163.5,54 163.5,49.9 163,49.4 159.2,49.4 159.2,53.9 159.3,54 159.5,54
GND on Layer 1 "GND_L02_P017" (solid, pour order 17): 129.825,42.675 ccw(c131.987,42.687) 132,40.525 178.25,40.525 ccw(c178.263,42.712) 180.45,42.7 180.45,96 180.5,96.575 ccw(c178.5,96.575) 178.5,98.575 133,98.575 132.365,98.5 ccw(c132.365,95.96) 129.825,95.96
VM on Layer 1 "VM_L02_P010" (solid, pour order 10): 145.9,81.2 146.225,81.525 148,81.525 148,43.9 147.5,43.4 147.1,43.8 145.6,43.8 145.6,68.8 145.5,68.7 141.1,68.7 141.1,71.6 141.3,71.4 146.3,71.4 146.3,72.8 146.1,73.4 145.9,74.2
VCC on Layer 2 "VCC_L03_P019" (solid, pour order 19): 129.825,42.675 ccw(c131.987,42.687) 132,40.525 178.25,40.525 ccw(c178.263,42.712) 180.45,42.7 180.45,96 180.5,96.575 ccw(c178.5,96.575) 178.5,98.575 133,98.575 132.365,98.5 ccw(c132.365,95.96) 129.825,95.96

## Other copper
Top Layer:
  region net VM: 146.3,81 146.275,73.15 147.475,73.15 147.55,73.225 147.475,73.3 147.475,78.675 147.625,78.675 148.125,79.175 148.125,81 146.3,81 146.3,81.025 146.275,81
  pour cut-out: 169.425,71.425 169.025,71.7 166.2,71.7 166.2,68.65 165.1,67.55 165.05,67.55 165.05,67.4 164.975,67.325 164.897,67.403 162.197,67.403 162.197,65.183 162.234,65.146 162.338,65.25 164.15,65.25 164.15,65.203 164.975,64.25 164.65,62.45 164.625,62.45 164.625,62.3 168.075,58.85 171.475,62.25 171.475,64.9 170.3,66.075 170.675,66.45 170.675,71.075 170.05,71.075 169.912,70.938
Layer 2:
  pour cut-out: 162.363,65.225 162.475,65.337 162.475,67.325 165.025,67.325 166.25,68.55 166.25,70.7 166.25,71.725 171.525,71.725 171.525,62.25 168.1,58.825 164.65,62.275 164.65,62.65 164.75,64.45 163.975,65.225

## Silkscreen, mask and mechanical layers (free items; w line width, h text height)
Top Overlay:
  region: 155.248,89.194 155.248,84.4 156.775,84.4 156.775,89.194
  region: 156.123,54.869 156.123,50.075 157.65,50.075 157.65,54.869
  region: 138.769,42.502 133.975,42.502 133.975,40.975 138.769,40.975
  region: 130.4,96.1 130.4,91.306 131.927,91.306 131.927,96.1
  region: 176.769,97.452 171.975,97.452 171.975,95.925 176.769,95.925
  region: 141.2,54.8 141.2,59.594 139.673,59.594 139.673,54.8
  region: 176.125,43.402 171.331,43.402 171.331,41.875 176.125,41.875
  lines w0.254: 137,85.9 138.5,85.9 ; 137.045,73.419 138.419,73.419 138.5,73.5 138.5,89.5 138.3,89.7 137.2,89.7 ; 137.045,77.128 138.372,77.128 ; 137.2,81.8 138.5,81.8 ; 138.75,43.75 140.75,43.75 140.75,53.75 140.25,53.75 140,53.5 139.5,53.5 139.25,53.75 138.75,53.75 ; 138.75,48.275 140.75,48.275 ; 138.908,70.575 138.908,79.109 149.357,79.109 ; 171.45,50.475 173.45,50.475 ; 173.45,45 172.95,45 172.7,45.25 172.2,45.25 171.95,45 171.45,45 171.45,55 173.45,55 ; 142.475,48.325 142.475,56.834 150.149,56.834 153.8,56.859 153.8,48.325 142.475,48.325
  text "SWD" at 148.375,94.775 h0.8
  text "RESET" at 140.3,89.375 h0.8
  text "USB/UART" at 174.565,89.375 h0.8 r90
  text "AOUT1" at 138.25,86.5 h0.6 r90
  text "DRVS-Motor" at 150.975,82.6 h1.2
  text "AOUT2" at 138.25,82.25 h0.6 r90
  text "Stepper" at 139.558,80.325 h0.8 r90
  text "DEBUG" at 172.375,79.625 h0.8 r90
  text "BOUT2" at 138.25,78 h0.6 r90
  text "BOUT1" at 138.25,73.75 h0.6 r90
  text "STM32" at 158.686,72.759 h0.8
  text "nFAULT" at 174.5,69.95 h0.6 r90
  text "Status" at 174.325,64.55 h0.6 r90
  text "BOOT" at 174.525,57.5 h0.8 r90
  text "VIN" at 173.075,52.125 h0.8 r90
  text "OUT M-" at 140.075,49.575 h0.6 r90
  text "DRV8874x" at 145.175,48.8 h0.8 r90
  text "GND" at 172.9,46.4 h0.8 r90
  text "BLDC-MOTOR" at 142.025,45.55 h0.8 r90
  text "OUT M+" at 139.85,44.25 h0.6 r90

## Text inside footprints (layer, text, board x,y; h text height)
J8: Mechanical 1 "board edge" at 180.825,87.375 h0.6 r90